# EAGLE board v3.1 (EAGLE 6.1)
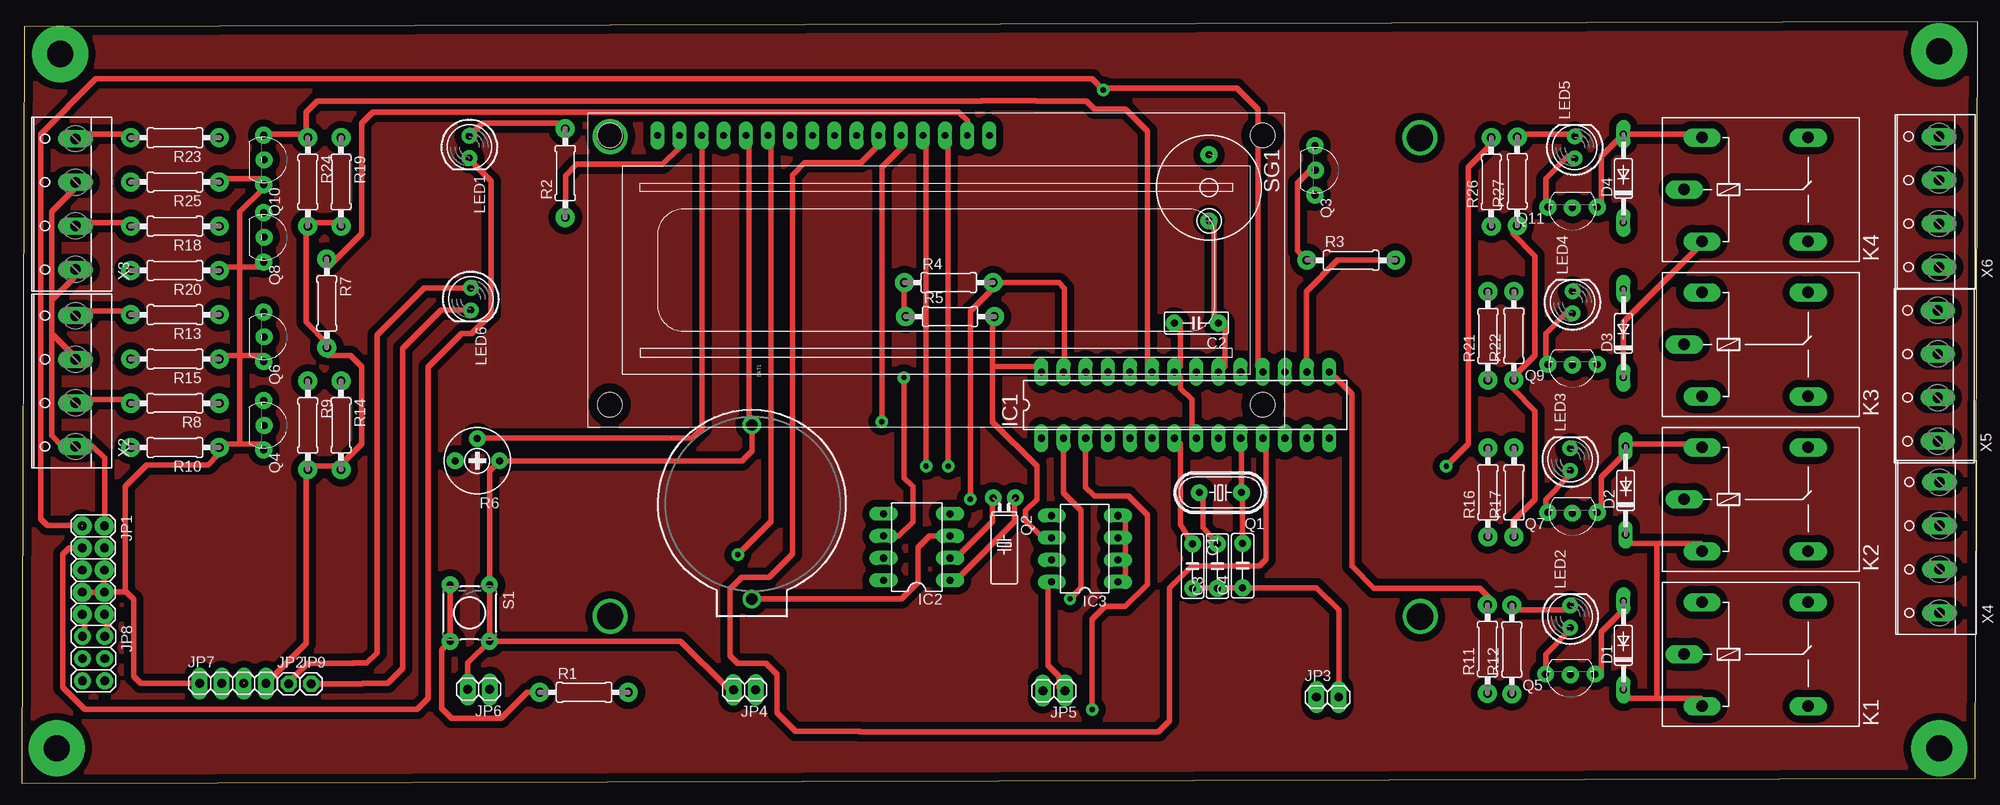
[diagram p0: board, top side]
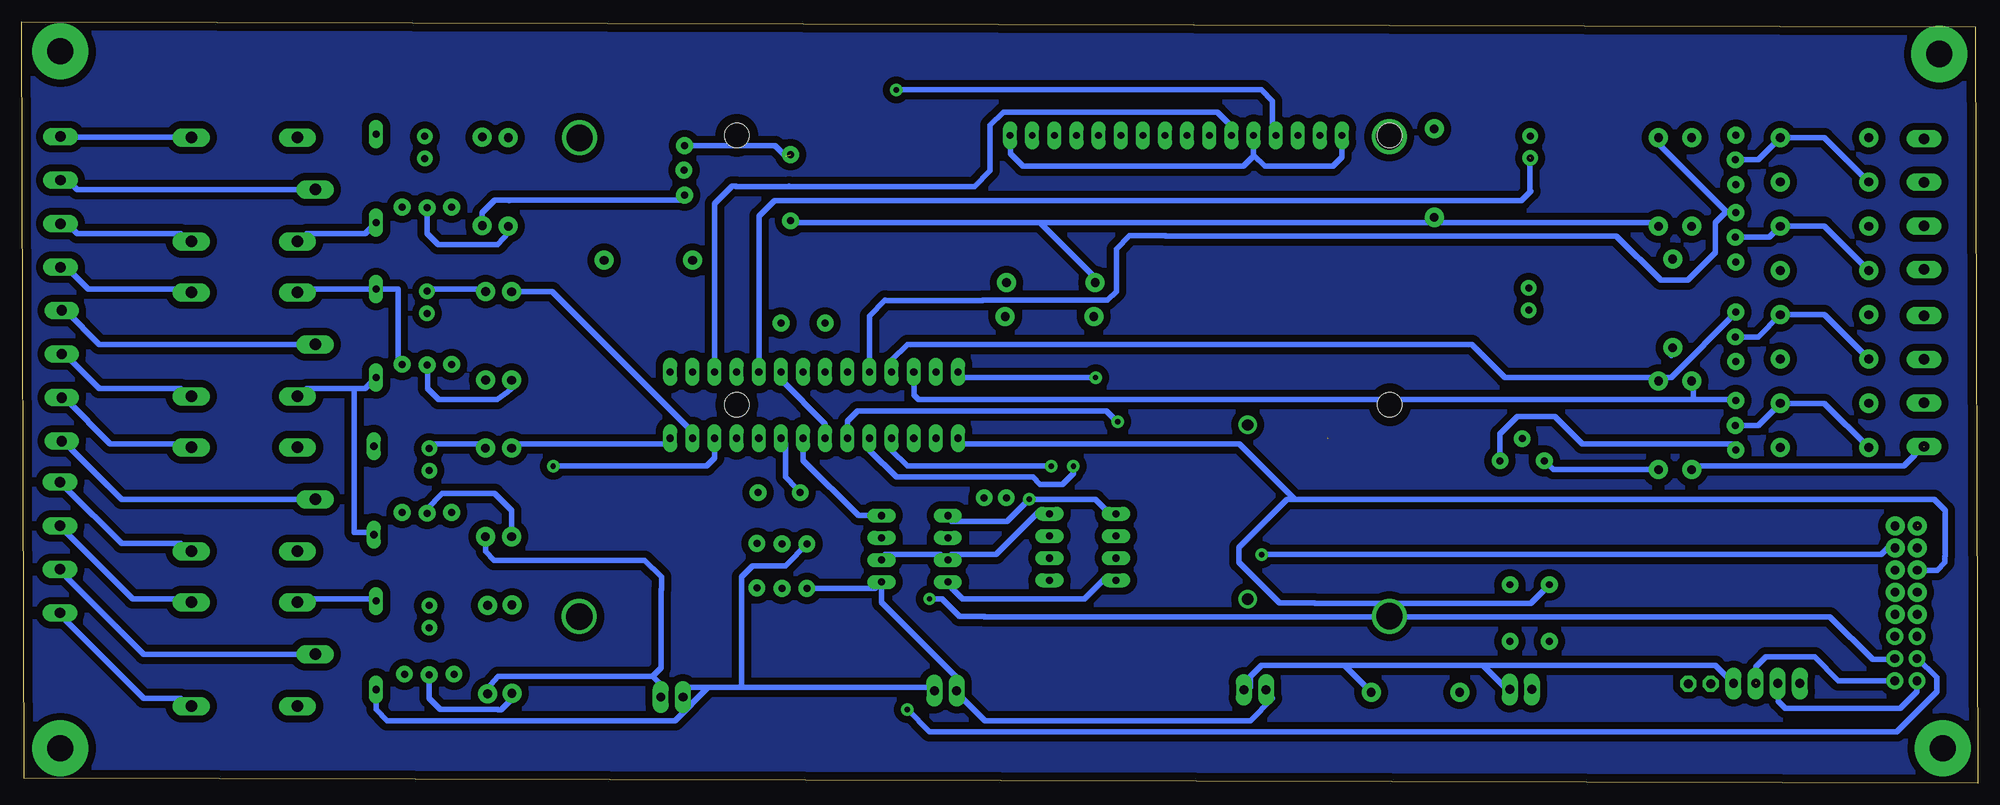
[diagram p1: board, bottom side, seen from below]

Size 224.42 x 87.39 mm. Coordinates in mm from the lower left corner, seen from the top.
Outline: 0,0 224.12,0.57 224.42,87.39 0.3,86.82 0,0
Copper layers (1*16): Top 0.035mm / dielectric 1.5mm / Bottom 0.035mm
Design rules: minimum track width 24mil, minimum drill 24mil, track to track 16mil, track to pad 16mil, pad to pad 16mil, via to via 16mil, smd to smd 16mil, copper to edge 40mil, drill to drill 16mil, minimum pad ring 16mil, minimum via ring 16mil, stop-mask expansion 16mil, vias tented up to drill 0mil, thermal gap 16mil

## Footprints (pad centres in the part's own frame; a part is rotated, then mirrored left to right if it is on the bottom)
BATTCOM_20MM_PTH = drill 1.3: 1 20,0; 2 0,0
C050-025X075 = drill 0.8 pad 1.93: 1 -2.54,0; 2 2.54,0
DO35-10 = drill 0.813 long: A 5.08,0; C -5.08,0
DIL28-3 = drill 0.813 long: 1 -16.51,-3.81; 2 -13.97,-3.81; 3 -11.43,-3.81; 4 -8.89,-3.81; 5 -6.35,-3.81; 6 -3.81,-3.81; 7 -1.27,-3.81; 8 1.27,-3.81; 9 3.81,-3.81; 10 6.35,-3.81; 11 8.89,-3.81; 12 11.43,-3.81; 13 13.97,-3.81; 14 16.51,-3.81; 15 16.51,3.81; 16 13.97,3.81; 17 11.43,3.81; 18 8.89,3.81; 19 6.35,3.81; 20 3.81,3.81; 21 1.27,3.81; 22 -1.27,3.81; 23 -3.81,3.81; 24 -6.35,3.81; 25 -8.89,3.81; 26 -11.43,3.81; 27 -13.97,3.81; 28 -16.51,3.81
DIL08 = drill 0.813 long: 1 -3.81,-3.81; 2 -1.27,-3.81; 3 1.27,-3.81; 4 3.81,-3.81; 5 3.81,3.81; 6 1.27,3.81; 7 -1.27,3.81; 8 -3.81,3.81
2X05 = drill 1 pad 2.184: 1 -5.08,-1.27; 2 -5.08,1.27; 3 -2.54,-1.27; 4 -2.54,1.27; 5 0,-1.27; 6 0,1.27; 7 2.54,-1.27; 8 2.54,1.27; 9 5.08,-1.27; 10 5.08,1.27
1X01 = drill 1.016 octagon: 1 0,0
1X02 = drill 1.016 long: 1 -1.27,0; 2 1.27,0
1X04 = drill 1.016 long: 1 -3.81,0; 2 -1.27,0; 3 1.27,0; 4 3.81,0
2X03 = drill 1.016 pad 1.93: 1 -2.54,-1.27; 2 -2.54,1.27; 3 0,-1.27; 4 0,1.27; 5 2.54,-1.27; 6 2.54,1.27
G5LE = drill 1.321 long: 1 -7.493,-5.969; 2 -7.493,5.969; O 4.699,5.969; P -9.525,0; S 4.699,-5.969
LED5MM = drill 0.8 pad 1.778: A -1.27,0; K 1.27,0
HC49U-V = drill 0.8 pad 1.93: 1 -2.413,0; 2 2.413,0
TC38H = drill 0.8 pad 1.93: 1 -1.27,0; 2 1.27,0
TO92 = drill 0.8 pad 1.93: 1 2.84,0; 2 0,0.075; 3 -2.84,0
0207/10 = drill 1 pad 2.184: 1 -5.08,0; 2 5.08,0
RTRIM3339P = drill 0.8 pad 1.93: 1 -2.54,0; 2 0,-2.54; 3 2.54,0
TACTILE-PTH = drill 0.8 pad 1.93: 1 -3.251,2.261; 2 3.251,2.261; 3 -3.251,-2.261; 4 3.251,-2.261
BMT1205XH7.5 = drill 0.8 pad 1.93: + 3.8,0; - -3.8,0
LCD1602 = drill 0.8 long: 1 8,33.46; 2 10.54,33.46; 3 13.08,33.46; 4 15.62,33.46; 5 18.16,33.46; 6 20.7,33.46; 7 23.24,33.46; 8 25.78,33.46; 9 28.32,33.46; 10 30.86,33.46; 11 33.4,33.46; 12 35.94,33.46; 13 38.48,33.46; 14 41.02,33.46; 15 43.56,33.46; 16 46.1,33.46 | hole 2.8: 2.54,2.54; 2.54,33.46; 77.46,33.46; 77.46,2.54
W237-4 = drill 1.194 long: 1 -7.5,-1.27; 2 -2.5,-1.27; 3 2.5,-1.27; 4 7.5,-1.27

## Placement (x,y rotation side)
BAT1  [BATTCOM_20MM_PTH]  83.77,41.11 270 top
C1  [C050-025X075]  134.34,24.91 270 top
C2  [C050-025X075]  134.77,52.82 180 top
C3  [C050-025X075]  137.19,24.91 90 top
C4  [C050-025X075]  140.08,24.96 90 top
D1  1N4148DO35-10  [DO35-10]  183.77,15.82 90 top
D2  1N4148DO35-10  [DO35-10]  184.03,33.6 90 top
D3  1N4148DO35-10  [DO35-10]  183.77,51.63 90 top
D4  1N4148DO35-10  [DO35-10]  183.77,69.41 90 top
IC1  MEGA8-P  [DIL28-3]  133.5,43.4 0 top
IC2  DS1307  [DIL08]  102.69,27.09 90 top
IC3  AT24CP  [DIL08]  121.97,26.89 90 top
JP1  [2X05]  8.21,24.45 270 top
JP2  [1X01]  30.64,11.42 0 top
JP3  [1X02]  149.84,9.87 0 top
JP4  [1X02]  82.93,10.71 180 top
JP5  [1X02]  118.44,10.61 180 top
JP6  [1X02]  52.43,10.76 180 top
JP7  [1X04]  24.21,11.45 0 top
JP8  [2X03]  8.23,14.29 270 top
JP9  [1X01]  33.21,11.41 0 top
K1  G5L  [G5LE]  200.28,14.8 0 top
K2  G5L  [G5LE]  200.28,32.58 0 top
K3  G5L  [G5LE]  200.28,50.36 0 top
K4  G5L  [G5LE]  200.28,68.14 0 top
LED1  [LED5MM]  51.35,73.01 270 top
LED2  [LED5MM]  177.68,19.12 90 top
LED3  [LED5MM]  177.68,37.15 90 top
LED4  [LED5MM]  177.93,55.19 90 top
LED5  [LED5MM]  178.18,72.97 90 top
LED6  [LED5MM]  51.52,55.56 270 top
Q1  [HC49U-V]  137.52,33.34 180 top
Q2  [TC38H]  112.73,32.76 180 top
Q3  BC547  [TO92]  148.38,70.35 270 top
Q4  BC547  [TO92]  27.74,41.06 270 top
Q5  BC547  [TO92]  177.68,12.51 180 top
Q6  BC547  [TO92]  27.74,51.22 270 top
Q7  BC547  [TO92]  177.93,31.06 180 top
Q8  BC547  [TO92]  27.74,62.65 270 top
Q9  BC547  [TO92]  177.93,48.07 180 top
Q10  BC547  [TO92]  27.74,71.54 270 top
Q11  BC547  [TO92]  177.93,66.11 180 top
R1  [0207/10]  64.51,10.43 0 top
R2  [0207/10]  62.36,70.02 90 top
R3  [0207/10]  152.53,60.01 0 top
R4  [0207/10]  106.35,57.45 0 top
R5  [0207/10]  106.5,53.56 0 top
R6  [RTRIM3339P]  52.27,37 180 top
R7  [0207/10]  35,55.06 270 top
R8  [0207/10]  17.58,43.6 180 top
R9  [0207/10]  32.82,41.06 270 top
R10  [0207/10]  17.58,38.52 180 top
R11  [0207/10]  168.18,15.38 90 top
R12  [0207/10]  170.97,15.33 90 top
R13  [0207/10]  17.58,53.76 180 top
R14  [0207/10]  36.63,41.06 270 top
R15  [0207/10]  17.58,48.68 180 top
R16  [0207/10]  168.23,33.37 90 top
R17  [0207/10]  171.22,33.37 90 top
R18  [0207/10]  17.58,63.92 180 top
R19  [0207/10]  36.63,69 270 top
R20  [0207/10]  17.58,58.84 180 top
R21  [0207/10]  168.23,51.32 90 top
R22  [0207/10]  171.2,51.35 90 top
R23  [0207/10]  17.58,74.08 180 top
R24  [0207/10]  32.82,69 270 top
R25  [0207/10]  17.58,69 180 top
R26  [0207/10]  168.61,69 90 top
R27  [0207/10]  171.58,69.08 90 top
S1  [TACTILE-PTH]  51.4,19.53 270 top
SG1  BMT1205XH7.5  [BMT1205XH7.5]  136.22,68.34 270 top
X1  HD44780LCD-1602  [LCD1602]  64.92,40.89 0 top
X2  [W237-4]  4.88,46.14 90 top
X3  [W237-4]  4.88,66.46 90 top
X4  [W237-4]  218.77,27.04 90 top
X5  [W237-4]  218.57,46.75 90 top
X6  [W237-4]  218.7,66.72 90 top

## Library data of the parts
BAT1 S1 = SparkFun-Electromechanical
C1-C4 R1-R27 = rcl
D1-D4 = diode
IC1 = atmel; OC_FARNELL: unknown; OC_NEWARK: unknown
IC2 X1 = adafruit
IC3 = atmel; MPN: AT24C1024BW-SH-B; OC_FARNELL: 1362646; OC_NEWARK: 03P2044
JP1-JP9 = pinhead
K1-K4 = relay; OC_FARNELL: unknown; OC_NEWARK: unknown
LED1-LED6 = led
Q1 = crystal; OC_FARNELL: 1666969; OC_NEWARK: unknown
Q2 = crystal; OC_FARNELL: unknown; OC_NEWARK: unknown
Q3-Q11 = transistor-npn
SG1 = buzzer; OC_FARNELL: unknown; OC_NEWARK: unknown
X2-X6 = con-wago-500; OC_FARNELL: unknown; OC_NEWARK: unknown

## Nets
+5V: C1.1 C2.1 D1.C D2.C D3.C D4.C IC1.7 IC1.20 IC2.8 IC3.8 JP1.2 JP3.1 JP4.1 JP5.1 JP6.1 JP7.4 K1.1 K2.1 K3.1 K4.1 R1.2 R2.1 R4.1 R5.1 R6.3 R7.2 R9.2 R14.2 R19.2 R24.2 SG1.+ X1.2 X2.1 X2.3 X3.1 X3.3
BUZZER: IC1.16 R3.2
C1: K1.P X4.2
C2: K2.P X5.1
C3: K3.P X5.4
C4: K4.P X6.3
DBG_LED: IC1.19 JP1.3 LED1.K
DIN1: IC1.26 Q4.3 R9.1
DIN2: IC1.25 Q6.3 R14.1
DIN3: IC1.24 Q8.3 R19.1
DIN4: IC1.23 Q10.3 R24.1
DOUT1: IC1.15 R11.2
DOUT2: IC1.14 R16.2
DOUT3: IC1.13 R21.2
DOUT4: IC1.12 R26.2
GND: BAT1.2 C1.2 C2.2 C3.1 C4.1 IC1.8 IC1.22 IC2.4 IC3.1 IC3.2 IC3.3 IC3.4 IC3.7 JP1.6 JP1.7 JP1.8 JP3.2 JP4.2 JP5.2 JP6.2 JP7.1 Q3.1 Q4.1 Q6.1 Q8.1 Q10.1 R6.1 R10.1 R12.1 R15.1 R17.1 R20.1 R22.1 R25.1 R27.1 S1.1 S1.2 X1.1 X1.5 X1.16
GRX: JP7.3 JP8.6
GTX: JP7.2 JP8.5
LCD/D4: IC1.11 X1.11
LCD/D5: IC1.6 X1.12
LCD/D6: IC1.5 X1.13
LCD/D7: IC1.4 X1.14
LCD/EN: IC1.17 JP1.4 X1.6
LCD/RS: IC1.18 JP1.1 X1.4
MRX: IC1.2 JP8.4
MTX: IC1.3 JP8.3
N$1: IC2.2 Q2.2
N$2: R7.1 X1.15
N$3: IC2.1 Q2.1
N$4: LED1.A R2.2
N$5: C3.2 IC1.9 Q1.2
N$6: C4.2 IC1.10 Q1.1
N$7: Q3.2 R3.1
N$8: Q3.3 SG1.-
N$9: R6.2 X1.3
N$10: X1.7
N$11: BAT1.1 IC2.3
N$12: X1.8
N$13: X1.9
N$14: X1.10
N$15: JP2.1 LED6.A
N$16: Q4.2 R8.1 R10.2
N$17: JP9.1 LED6.K
N$18: Q5.2 R11.1
N$19: LED2.A Q5.1
N$20: LED2.K R12.2
N$21: D1.A K1.2 Q5.3
N$27: Q6.2 R13.1 R15.2
N$28: Q7.2 R16.1
N$29: LED3.A Q7.1
N$30: LED3.K R17.2
N$31: D2.A K2.2 Q7.3
N$32: Q8.2 R18.1 R20.2
N$33: Q9.2 R21.1
N$34: LED4.A Q9.1
N$35: LED4.K R22.2
N$36: D3.A K3.2 Q9.3
N$37: Q10.2 R23.1 R25.2
N$38: Q11.2 R26.1
N$39: LED5.A Q11.1
N$40: LED5.K R27.2
N$41: D4.A K4.2 Q11.3
NC1: K1.O X4.3
NC2: K2.O X5.2
NC3: K3.O X6.1
NC4: K4.O X6.4
NO1: K1.S X4.1
NO2: K2.S X4.4
NO3: K3.S X5.3
NO4: K4.S X6.2
PRX: JP1.10 JP8.2
PTX: JP1.9 JP8.1
RST: IC1.1 JP1.5 R1.1 S1.3 S1.4
SCL: IC1.28 IC2.6 IC3.6 R5.2
SDA: IC1.27 IC2.5 IC3.5 R4.2
SN1: R8.2 X2.2
SN2: R13.2 X2.4
SN3: R18.2 X3.2
SN4: R23.2 X3.4

## Tracks (layer width: path | path; a pad name or v marks a point on that pad's centre or on a via)
+5V  (1 unrouted)
  Top 0.61: R19.2 36.45,64.33 32.64,64.33 R24.2 32.64,63.06 32.64,52.9 35.18,50.36 R7.2 35.18,49.09 37.72,49.09 38.99,47.82 38.99,38.93 36.45,36.39 | 3.43,51.63 5.97,49.09 X2.3 | 3.43,55.44 3.43,51.63 | 3.43,55.44 5.97,57.98 X3.1 | 3.43,55.44 3.43,65.6 5.97,68.14 X3.3 | 3.43,51.63 3.43,41.47 3.43,39.89 4.66,38.66 6.14,38.66 | JP7.4 32.64,16.07 32.64,35.12 R9.2 32.64,36.39 36.45,36.39 | 36.45,36.39 R14.2 | 187.58,27.5 192.66,27.5 K2.1 | 187.58,27.5 183.77,27.5 D2.C | 187.58,9.72 192.66,9.72 K1.1 | 187.58,9.72 183.77,9.72 D1.C | 187.58,9.72 187.58,27.5 | D3.C 183.77,52.9 192.66,61.79 K4.1 | IC3.8 117.73,22.42 117.73,13.53 119,12.26 119,10.99 JP5.1 | R4.1 101.22,56.71 101.22,54.17 R5.1 | C1.1 132.97,29.67 132.97,38.93 IC1.7 | IC1.20 138.05,47.82 138.05,52.9 C2.1 136.78,52.9 136.78,64.33 SG1.+ | JP1.2 9.49,29.54 9.49,37.32 8.17,38.64 6.17,38.64 | 6.14,38.66 6.27,38.66 | X2.1 6.14,38.66 | R2.1 62.39,64.97 62.39,69.74 63.69,71.04 72.26,71.04 72.27,71.03 73.55,71.03 75.46,72.94 X1.2
  Bottom 0.61: 35.18,49.09 R7.2 | R19.2 36.45,64.33 61.85,64.33 R2.1 63.12,64.33 63.13,64.32 107.66,64.32 107.67,64.33 | 56.77,13.53 72.69,13.53 | 72.69,13.53 82.17,13.53 83.44,12.26 83.44,10.99 JP4.1 | 56.77,13.53 54.23,10.99 53.93,10.99 JP6.1 | JP7.4 30.1,13.53 56.77,13.53 | X2.1 7.24,37.66 8.51,36.39 32.64,36.39 R9.2 | D4.C 185.04,63.06 191.76,63.06 K4.1 | D3.C 185.04,45.28 186.31,45.28 | 186.31,45.28 191.76,45.28 K3.1 | 186.31,45.28 186.31,28.77 183.77,28.77 D2.C | IC2.8 99.95,23.69 102.49,21.15 116.46,21.15 117.73,22.42 IC3.8 | 141.86,10.99 120.27,10.99 JP5.1 | 141.86,10.99 145.67,10.99 | 145.67,10.99 148.21,10.99 JP3.1 | 107.67,64.33 135.51,64.33 SG1.+ | 107.67,64.33 107.57,64.33 101.22,57.98 R4.1 | 141.86,10.99 141.86,23.69 140.59,24.96 136.78,24.96 134.24,27.5 C1.1 | D1.C 183.77,8.45 182.5,7.18 149.48,7.18 145.67,10.99 | IC1.7 132.24,41.24 137.26,46.27 137.26,47.72 137.31,47.67 IC1.20 | R6.3 48.71,35.98 R14.2 | R1.2 72.69,13.53
BUZZER
  Top 0.61: IC1.16 147.4,47.29 147.4,56.44 150.97,60.01 R3.2
C1
  Bottom 0.61: K1.P 210.44,14.8 219.33,23.69 X4.2
C2
  Bottom 0.61: K2.P 212.98,32.58 219.33,38.93 X5.1
C3
  Bottom 0.61: K3.P 215.52,50.36 219.33,54.17 X5.4
C4
  Bottom 0.61: K4.P 218.06,68.14 219.33,69.41 X6.3
DBG_LED  (1 unrouted)
  Top 0.61: LED1.K 51.35,71.61 53.85,69.12 53.85,53.85 51.59,51.59 50.46,51.59 46.63,47.77 46.63,43.99 46.63,9.74 45.34,8.45 7.24,8.45 4.7,10.99 4.7,26.23 5.47,27 JP1.3 | JP1.3 | JP1.3
  Bottom 0.61: IC1.19 139.85,65.07 138.05,66.87 52.35,66.87 51.28,67.94 51.36,68.01 LED1.K
DIN1
  Bottom 0.61: 32.64,44.01 120.27,44.01 120.3,44.04 121.56,44.04 122.08,44.55 IC1.26 | 32.64,44.01 27.56,44.01 Q4.3 | 32.64,44.01 32.64,45.28 R9.1
DIN2
  Bottom 0.61: 36.45,46.55 54.23,46.55 58.04,50.36 122.81,50.36 124.61,48.56 IC1.25 | 36.45,46.55 35.18,46.55 27.56,54.17 Q6.3 | 36.45,46.55 R14.1
DIN3
  Bottom 0.61: 28.83,65.6 30.1,64.33 30.1,61.79 30.08,61.77 30.08,60.92 33.28,57.72 36.37,57.72 41.46,62.81 93.21,62.81 93.22,62.82 97.31,62.82 98.84,61.29 98.84,56.42 99.84,55.42 114.16,55.42 114.17,55.41 125.35,55.41 125.35,55.44 127.16,53.63 IC1.24 | 28.83,65.6 27.56,65.6 Q8.3 | 28.83,65.6 36.45,73.22 R19.1
DIN4
  Top 0.61: 32.64,74.49 32.64,77.03 33.91,78.3 110.11,78.3 110.12,78.31 116.38,78.31 116.41,78.28 122.17,78.28 123.09,77.37 126.62,77.37 129.16,74.83 129.16,59.25 129.16,58.73 129.16,47.82 IC1.23 | 32.64,74.49 27.56,74.49 Q10.3 | 32.64,74.49 R24.1
DOUT1
  Top 0.61: IC1.15 150.75,46.55 152.63,44.67 152.63,24.91 155.17,22.37 167.31,22.37 168.53,21.15 R11.2
DOUT2
  Bottom 0.61: IC1.14 150.75,38.93 167.26,38.93 R16.2
DOUT3
  Bottom 0.61: IC1.13 147.47,40.33 163.55,56.41 R21.2
DOUT4  (via drill 0.61)
  Top 0.61: v163.45,36.39 165.99,38.93 165.99,70.68 168.53,73.22 R26.2
  Bottom 0.61: v163.45,36.39 145.87,36.39 144.94,37.33 IC1.12
GND  (2 unrouted)
  Top 0.61: C2.2 132.97,52.9 132.97,47.82 IC1.22 132.97,46.55 132.97,45.28 134.24,44.01 134.24,40.2 IC1.8 | IC3.4 126.62,30.04 126.62,28.77 IC3.3 126.62,27.5 126.62,26.23 IC3.2 126.62,24.96 126.62,23.69 IC3.1 | 106.3,31.31 IC2.4 | R27.1 171.07,63.06 173.61,60.52 173.61,49.09 171.07,46.55 R22.1 171.07,45.28 173.61,42.74 173.61,32.58 171.07,30.04 171.07,28.77 R17.1 | C1.2 134.24,22.42 136.78,22.42 C3.1 138.05,22.42 C4.1 140.59,22.42 140.6,22.41 148.56,22.41 151.1,19.87 JP3.2 | 25.02,38.93 22.48,38.93 R10.1 22.48,37.66 21.36,36.54 14.31,36.54 11.86,34.08 11.86,21.99 11.95,21.99 12,21.94 | 25.02,38.93 27.56,38.93 Q4.1 | 25.02,49.09 22.48,49.09 R15.1 | 25.02,49.09 27.56,49.09 Q6.1 | 25.02,49.09 25.02,38.93 | R25.1 22.48,69.41 27.56,69.41 Q10.1 27.56,68.14 25.02,65.6 25.02,59.25 | 25.02,59.25 22.48,59.25 R20.1 | 25.02,59.25 27.56,59.25 Q8.1 | 25.02,59.25 25.02,49.09 | JP4.2 80.9,10.99 75.61,16.28 S1.2 | S1.2 51.16,13.78 JP6.2 | S1.2 S1.1 53.66,35.85 R6.1 | 12,21.94 9.51,21.94 JP1.8 | 12,21.94 12.03,21.91 | JP7.1 13.66,11.45 12.86,12.25 12.86,21.08 12.03,21.91 | JP1.6 JP1.8 | JP1.8 JP1.7 | 12.03,21.91 12,21.91 | 54.84,36.99 80.23,36.99 80.24,37 82.66,37 83.77,38.11 BAT1.2 83.44,41.47 83.44,73.22 83.08,73.58 X1.5 | JP3.2 | JP3.2
  Bottom 0.61: IC3.2 125.35,26.23 119,26.23 IC3.7 117.73,26.23 112.65,26.23 107.57,31.31 IC2.4 | 152.02,12.26 169.79,12.26 171.05,10.82 R12.1 | 152.02,12.26 150.75,10.99 JP3.2 | Q4.1 27.56,38.93 45.34,38.93 48.51,42.1 52.8,42.1 54.81,40.09 R6.1 | JP4.2 80.9,9.72 83.44,7.18 113.92,7.18 116.46,9.72 JP5.2 117.16,10.62 117.16,12.14 125.78,20.76 IC3.1 | IC1.8 134.78,37.05 128.43,30.7 IC3.4 | X1.1 72.93,71.87 73.97,70.81 81.79,70.81 83.08,72.1 X1.5 83.08,71.98 84.25,70.81 109.53,70.81 111,72.28 111,74.32 X1.16 | 152.02,12.26 151.05,13.23 151.05,22.24 151.04,22.25 151.04,23.67 152.95,25.58 170.21,25.58 171.23,26.6 R17.1 | IC3.1 126.49,22.37 C1.2 | R27.1 171.58,65.46 170.15,66.89 168.55,66.89 168.53,66.87 168.51,66.89 148.58,66.89 148.38,67.09 Q3.1
GRX  (1 unrouted)
  Bottom 0.61: JP8.6 15.98,11.75 18.7,14.47 24.34,14.47 25.45,13.35 25.45,11.52
GTX
  Bottom 0.61: JP8.5 6.94,11.73 7,11.66 7,10.5 8.9,8.6 22.1,8.6 22.9,9.4 22.9,11.4 22.94,11.44 JP7.2
LCD/D4
  Top 0.61: X1.11 98.33,73.24 96.3,71.21 89.83,71.21 88.41,69.79 88.41,26.32 85.73,23.64 82.59,23.64 81.24,22.29 81.24,19.31 81.24,14.63 82.13,13.74 85.38,13.74 86.65,12.47 86.65,8.07 88.77,5.96 89.67,5.96 89.69,5.94 91.06,5.94 91.07,5.93 96.12,5.93 96.14,5.91 130.43,5.91 131.7,7.18 131.7,22.42 134.24,24.96 142.02,24.96 142.75,25.69 142.75,27.3 142.77,27.31 142.77,39.22 IC1.11
LCD/D5  (via drill 0.61)
  Top 0.61: v98.68,41.47 98.68,70.68 101.22,73.22 X1.12
  Bottom 0.61: v98.68,41.47 99.95,42.74 128.53,42.74 129.69,41.57 IC1.6
LCD/D6  (via drill 0.61)
  Top 0.61: v103.76,36.39 103.76,73.22 X1.13
  Bottom 0.61: IC1.5 127.16,38.19 124.08,35.12 108.38,35.12 107.57,34.31 105.01,34.31 103.78,35.54 103.78,36.37 v103.76,36.39
LCD/D7  (via drill 0.61)
  Top 0.61: v106.3,36.39 106.3,73.22 X1.14
  Bottom 0.61: v106.3,36.39 122.81,36.39 124.61,38.19 IC1.4
LCD/EN  (via drill 0.61)
  Top 0.61: v82.17,26.23 85.98,30.04 85.98,73.22 85.62,73.58 X1.6
  Bottom 0.61: 136.48,68.48 136.41,68.51 | X1.6 85.98,74.49 85.98,75.76 87.25,77.03 111.78,77.03 113.31,75.5 113.31,70.29 115.11,68.49 136.48,68.49 136.48,68.48 | v82.17,26.23 11.05,26.23 9.78,27.5 JP1.4 | 136.48,68.48 136.48,68.49 142.45,68.49 142.46,68.5 142.92,68.5 144.92,66.5 144.92,47.22 | 144.92,47.22 IC1.17 | IC1.17 144.92,47.22
LCD/RS  (via drill 0.61)  (1 unrouted)
  Top 0.61: IC1.18 141.86,47.82 141.86,60.71 141.86,61.79 141.86,77.34 139.45,79.76 124.27,79.76 v124.08,79.57 122.81,80.84 8.51,80.84 2.16,74.49 2.16,33.85 2.17,33.85 2.17,30.3 2.91,29.55 6.9,29.55
  Bottom 0.61: v124.08,79.57 82.17,79.57 80.9,78.3 80.9,74.49 X1.4
MRX  (via drill 0.61)
  Top 0.61: v120.27,21.15 121.54,22.42 121.54,31.31 119.53,33.32 IC1.2
  Bottom 0.61: JP8.4 9.58,14.21 12.07,14.21 16.95,19.1 113.94,19.1 113.98,19.14 116.84,19.14 118.85,21.15 119.39,21.15 | 119.38,21.15 119.39,21.15 | 119.39,21.15 v120.27,21.15
MTX  (via drill 0.61)
  Top 0.61: IC1.3 122.06,35.75 122.06,35.74 122.06,33.95 123.06,32.95 126.23,32.95 126.99,32.95 129.14,30.8 129.14,22.83 126.6,20.29 124.29,20.29 122.81,18.81 v122.81,8.45
  Bottom 0.61: v122.81,8.45 120.27,5.91 9.29,5.91 4.7,10.5 4.7,12.13 6.91,14.34 JP8.3
N$1
  Top 0.61: IC2.2 107.57,26.23 111.38,30.04 111.38,32.58 Q2.2
N$2
  Top 0.61: R7.1 35.18,59.25 38.99,63.06 38.99,75.76 40.26,77.03 106.3,77.03 106.31,77.04 107.49,77.04 108.48,76.05 X1.15
N$3
  Top 0.61: IC2.1 107.57,23.69 113.92,30.04 113.92,32.58 Q2.1
N$4
  Top 0.61: R2.2 61.85,75.76 52.84,75.76 51.69,74.61 LED1.A
N$5
  Top 0.61: C3.2 135.51,29.35 135.51,32.58 Q1.2
  Bottom 0.61: IC1.9 136.78,38.93 136.78,35.12 135.51,33.85 Q1.2
N$6
  Top 0.61: IC1.10 139.93,39.51 Q1.1 140.08,33.19 C4.2
N$7
  Top 0.61: R3.1 146.94,60.52 146.34,61.12 146.34,68.85 147.84,70.35 Q3.2
N$8  (1 unrouted)
  Bottom 0.61: 136.78,71.95 138.02,73.19 Q3.3
N$9  (1 unrouted)
  Top 0.61: 74.63,39.6 52.33,39.6 | 52.33,39.6 52.22,39.6 | R6.2 52.33,39.6 | X1.3 78.08,74.27 78.08,43.05 78.07,43.04 78.07,41.44 78.08,41.43 78.08,40.73 76.95,39.6 74.56,39.6
N$11
  Top 0.61: BAT1.1 84.71,21.15 100.96,21.15 102.84,23.03 102.84,27.05 104.16,28.36 IC2.3 | IC2.3
N$15
  Top 0.61: LED6.A 51.49,56.85 46.09,56.85 46.09,56.77 40.75,51.43 40.75,21.82 40.75,21.77 | JP2.1 30.66,11.44 30.66,11.64 32.8,13.78 38.07,13.78 39.56,13.78 40.75,14.97 40.75,21.77 | 40.75,21.73 40.75,21.77
N$16
  Top 0.61: 12.32,38.93 R10.2
  Bottom 0.61: R10.2 17.58,43.6 R8.1 25.2,41.06 Q4.2
N$17
  Top 0.61: LED6.K 48.11,54.29 43.72,49.9 43.72,13.18 41.97,11.43 39.09,11.43 39.08,11.42 JP9.1
N$18
  Bottom 0.61: Q5.2 177.68,9.72 176.41,8.45 169.8,8.45 169.78,8.42 169.45,8.42 168.18,9.69 R11.1
N$19
  Top 0.61: LED2.A 177.42,17.34 174.88,14.8 174.88,12.26 Q5.1
N$20
  Top 0.61: LED2.K 177.42,19.88 171.07,19.88 R12.2
N$21
  Top 0.61: D1.A 183.77,19.88 181.23,17.34 181.23,12.26 Q5.3
  Bottom 0.61: K1.2 192.26,21.15 183.77,21.15 D1.A
N$22  (via drill 3 pad 6.45)
  other vias: 4.4,83.7
N$23  (via drill 3 pad 6.45)
  other vias: 4,4
N$24  (via drill 3 pad 6.45)
  other vias: 220,4
N$25  (via drill 3 pad 6.45)
  other vias: 220,84
N$26
  pour Bottom (isolate 0.813): 1,87 224,87 224,1 224,0 0,0
N$27
  Top 0.61: 12.32,49.09 R15.2
  Bottom 0.61: R15.2 17.58,53.76 R13.1 25.2,51.22 Q6.2
N$28
  Bottom 0.61: R16.1 168.22,31.28 170.19,33.25 176.18,33.25 177.93,31.5 Q7.2
N$29
  Top 0.61: LED3.A 177.42,35.12 174.88,32.58 174.88,31.31 Q7.1
N$30
  Bottom 0.61: LED3.K 177.42,38.93 171.07,38.93 R17.2
N$31
  Top 0.61: Q7.3 181.23,31.31 181.23,35.12 183.77,37.66 D2.A 183.77,38.93 192.66,38.93 K2.2
N$32
  Top 0.61: 12.32,59.25 R20.2
  Bottom 0.61: R20.2 17.58,63.92 R18.1 23.93,62.65 Q8.2
N$33
  Bottom 0.61: Q9.2 177.88,47.95 177.88,45.28 176.61,44.01 169.86,44.01 168.65,44.9 168.23,45.32 R21.1
N$34
  Top 0.61: LED4.A 177.42,54.17 174.88,51.63 174.88,47.82 Q9.1
N$35
  Bottom 0.61: LED4.K 177.42,56.71 171.07,56.71 R22.2
N$36
  Bottom 0.61: K3.2 192.66,56.71 D3.A 181.23,56.71 181.23,47.82 Q9.3
N$37
  Top 0.61: 12.32,69.41 R25.2
  Bottom 0.61: Q10.2 25.2,71.54 R23.1 17.58,74.08 R25.2
N$38
  Bottom 0.61: R26.1 168.54,63.17 169.81,61.79 176.63,61.79 177.9,63.06 177.9,66 Q11.2
N$39
  Top 0.61: LED5.A 177.42,71.95 174.88,69.41 174.88,66.87 Q11.1
N$40
  Top 0.61: LED5.K 177.42,74.49 172.34,74.49 R27.2
N$41
  Top 0.61: Q11.3 181.23,66.87 181.23,71.95 D4.A 192.66,74.49 K4.2
N$42  (via drill 3 pad 3.81)
  other vias: 67.53,74.22
N$43  (via drill 3 pad 3.81)
  other vias: 160.41,74.07
N$44  (via drill 3 pad 3.81)
  other vias: 160.46,19.12
N$45  (via drill 3 pad 3.81)
  other vias: 67.5,19.16
N$46
  pour Top (isolate 0.813): 0.33,86.87 221.39,86.87 223.93,84.33 223.93,0.81 2.46,0.81 -0.08,3.35 0.25,86.84
NC1
  Bottom 0.61: X4.3 219.33,28.77 211.71,21.15 205.36,21.15 K1.O
NC2
  Bottom 0.61: K2.O 205.89,38.93 214.25,38.93 219.33,44.01 X5.2
NC3
  Bottom 0.61: K3.O 205.89,56.71 216.79,56.71 219.33,59.25 X6.1
NC4
  Bottom 0.61: K4.O 205.01,74.14 219.89,74.14 X6.4
NO1
  Bottom 0.61: X4.1 219.38,18.68 219.27,18.55 210.44,9.72 206.2,9.72 205.03,8.95 K1.S
NO2
  Bottom 0.61: K2.S 205.03,26.73 206.2,27.5 212.98,27.5 219.33,33.85 X4.4
NO3
  Bottom 0.61: K3.S 205.03,44.51 206.2,45.28 215.52,45.28 219.33,49.09 X5.3
NO4
  Bottom 0.61: K4.S 205.03,62.29 206.2,63.06 218.06,63.06 219.33,64.33 X6.2
PRX
  Top 0.61: JP8.2 9.78,17.34 9.78,18.61 JP1.10
PTX
  Top 0.61: JP8.1 7.24,17.34 7.24,18.61 JP1.9
RST
  Top 0.61: R1.1 57.97,10.43 54.98,7.44 49.3,7.44 48.16,8.58 48.16,10.45 48.17,10.46 48.17,15.31 S1.4 S1.3
  Bottom 0.61: IC1.1 116.46,38.93 84.71,38.93 78.34,32.56 | JP1.5 6.91,24.43 4.65,24.43 3.76,25.32 3.76,26.05 3.74,26.08 3.74,31.31 5.01,32.58 49.15,32.58 49.17,32.56 78.34,32.56 | S1.3 51.29,20.63 76.03,20.63 76.08,20.68 80.14,20.68 84.77,25.31 84.77,27.06 79.27,32.56 78.34,32.56
SCL  (via drill 0.61)
  Top 0.61: 111.38,47.82 111.38,52.9 R5.2 | 111.38,47.82 111.38,41.47 116.46,36.39 116.46,32.58 115.19,31.31 115.19,30.12 117.14,28.17 IC3.6 | 111.38,47.82 116.46,47.82 IC1.28 | v101.22,46.55 v101.21,46.54 101.21,38.68 101.25,38.65 101.25,35.04 102.24,34.05 102.24,29.99 100.61,28.36 IC2.6
  Bottom 0.61: v101.22,46.55 116.46,46.55 IC1.28
SDA  (via drill 0.61)
  Top 0.61: v108.84,32.58 108.84,54.17 111.43,56.76 R4.2 118.99,57.45 119.64,56.79 119.64,47.32 IC1.27
  Bottom 0.61: IC3.5 117.73,30.04 111.38,30.04 v108.84,32.58 101.22,32.58 99.95,31.31 IC2.5
SN1
  Top 0.61: X2.2 7.24,44.01 12.32,44.01 R8.2
SN2
  Top 0.61: X2.4 7.24,54.17 12.32,54.17 R13.2
SN3
  Top 0.61: X3.2 7.24,64.33 12.32,64.33 R18.2
SN4
  Top 0.61: X3.4 7.24,74.49 12.32,74.49 R23.2